# Altium PCB Throttle_Digitizer.PcbDoc
Units mm, origin at the board's own origin, x right, y up, seen from the top; angles counter-clockwise.
Board outline 52 x 30 mm, 2 copper layers (Top Layer, Bottom Layer); 38 components, 22 nets, 124 pads, 0 vias.
Unrouted connection lines stored in the file: 29.
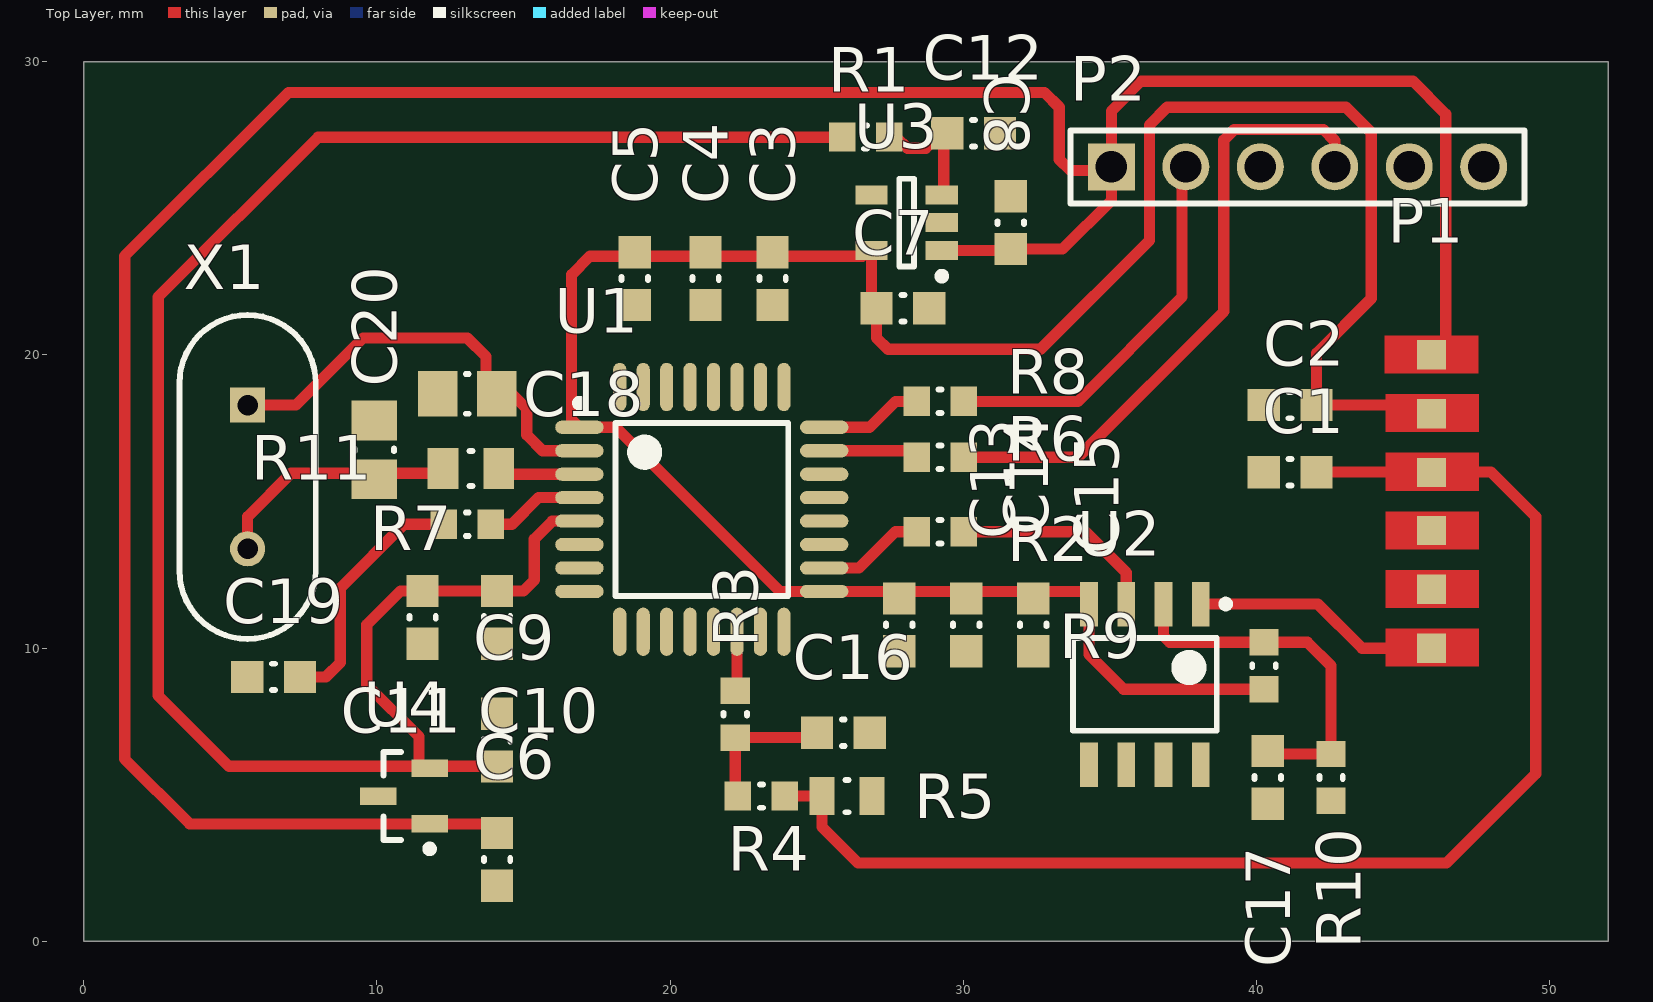
[diagram p0: Top Layer view]
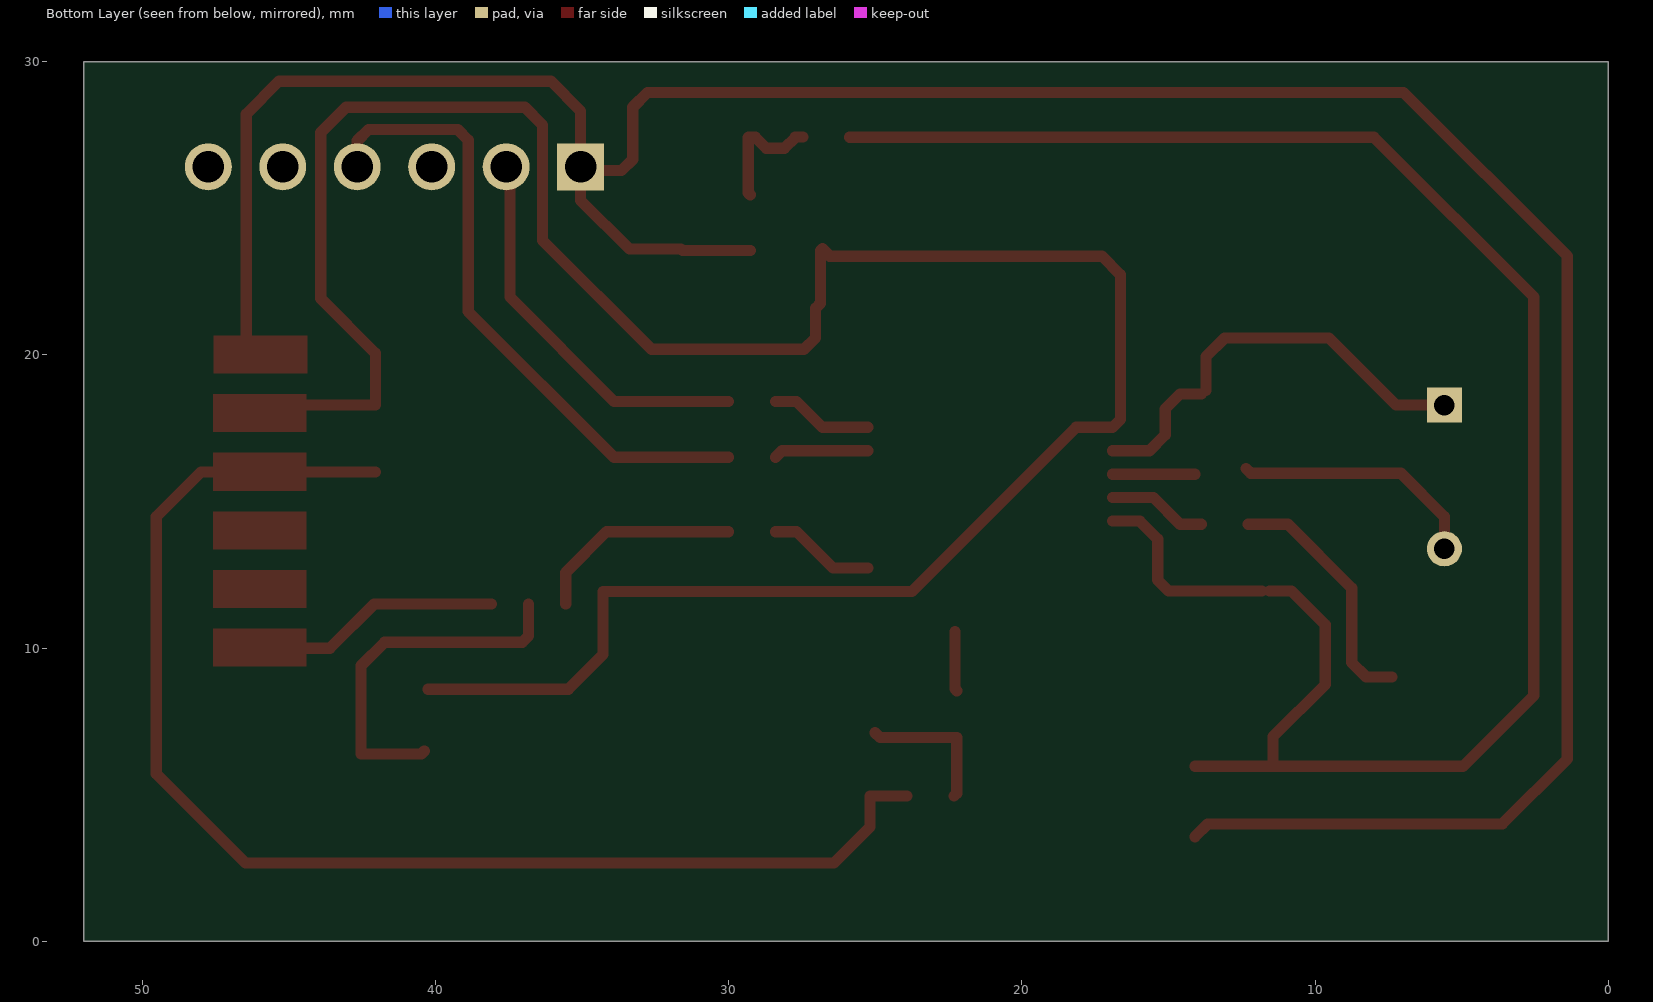
[diagram p1: Bottom Layer view, seen from below]

## Layer stack, top to bottom
Top Solder: solder mask 0.0102, Solder Resist, Dk 3.5
Top Layer: signal copper 0.0356
Dielectric 1: dielectric 0.32, FR-4, Dk 4.8
Bottom Layer: signal copper 0.0356
Bottom Solder: solder mask 0.0102, Solder Resist, Dk 3.5

## Board outline
0,0 52,0 52,30 0,30

## Design rules (kind name [scope] priority, off if disabled: settings)
AcuteAngle [All] p1: minimum=9.00000000000000E+0001 checktracksonly=FALSE
BoardOutlineClearance [All] p1: gap=0.254 except(0: Arc-SplitContinuation Track-SplitContinuation SMDPad-SplitContinuation THPad-SplitContinuation Via-SplitContinuation Fill-SplitContinuation Poly-SplitContinuation Region-SplitContinuation Text-SplitContinuation)
Clearance [All] p1: gap=0.254 except(0.381: Track-Poly SMDPad-Poly THPad-Poly Poly-Poly Poly-Region Poly-Text)
PolygonConnect [All vs InNet('GND')] p1: connectstyle=Direct reliefconductorwidth=0.254 reliefentries=4 polygonreliefangle="90 Angle" airgapwidth=0.254
RoutingVias [All] p1: holewidth=0.711 width=1.27 viastyle="Through Hole" minholewidth=0.711 minwidth=1.27 maxholewidth=0.711 maxwidth=1.27
SolderMaskExpansion [All] p1: expansion=0.102
Width [All] p1: maxlimit=1.27 minlimit=0.381 preferedwidth=0.508 toplayer_prefwidth=0.381 minimp=50.000000 maximp=50.000000 favimp=50.000000
30 further rules are at their usual default settings.

## Classes and differential pairs
component class Connector: C1 C2 P1 P2
component class Digitizer: C3 C4 C5 C6 C7 C8 C9 C10 C11 C12 C13 C14 C15 C16 C17 C18 C19 C20 R1 R2 R3 R4 R5 R6 R7 R8 R9 R10 R11 U1 U2 U3 U4 X1

## Components (designator, comment, footprint, x,y, rotation, side; value= is the part's Value field where it differs from the comment)
C1 "10nF 0603" CAPC0603(1608)100_M 41.148,16.002 r0 top
C2 "10nF 0603" CAPC0603(1608)100_M 41.148,18.288 r0 top
C3 "1uF 0603" CAPC0603(1608)100_M 23.495,22.606 r90 top
C4 "100nF 0603" CAPC0603(1608)100_M 21.209,22.606 r90 top
C5 "4.7nF 0603" CAPC0603(1608)100_M 18.796,22.606 r90 top
C6 "100nF 0603" CAPC0603(1608)100_M 14.097,2.794 r90 top
C7 "CAP 1uF 25V 0603(1608)" CAPC0603(1608)100_M 27.94,21.59 r180 top
C8 "100nF 0603" CAPC0603(1608)100_M 31.623,24.511 r270 top
C9 "CAP 1uF 25V 0603(1608)" CAPC0603(1608)100_M 14.097,6.858 r270 top
C10 "1uF 0603" CAPC0603(1608)100_M 14.097,11.049 r90 top
C11 "1uF 0603" CAPC0603(1608)100_M 11.557,11.049 r90 top
C12 "1uF 0603" CAPC0603(1608)100_M 30.353,27.559 r180 top
C13 "1uF 0603" CAPC0603(1608)100_M 27.813,10.795 r90 top
C14 "100nF 0603" CAPC0603(1608)100_M 30.099,10.795 r90 top
C15 "4.7nF 0603" CAPC0603(1608)100_M 32.385,10.795 r90 top
C16 "100nF 0603" CAPC0603(1608)100_M 25.908,7.112 r180 top
C17 "100nF 0603" CAPC0603(1608)100_M 40.386,5.588 r90 top
C18 "CAP 18pF 100V 0805(2012)" CAPC0805(2012)145_M 13.081,18.669 r180 top
C19 "100nF 0603" CAPC0603(1608)100_M 6.477,9.017 r0 top
C20 "CAP 18pF 100V 0805(2012)" CAPC0805(2012)145_M 9.906,16.764 r90 top
P1 "502352-0601" 502352-0601 45.974,15 r270 top
P2 "PHT-106-01-L-S" SMTC-PHT-106-01-X-S 35.052,26.416 r0 top
R1 "100K" RESC0603(1608)_N 26.67,27.432 r0 top
R2 "1K 0603" RESC0603(1608)_N 29.21,13.97 r0 top
R3 "1K 0603" RESC0603(1608)_N 22.225,7.747 r270 top
R4 "10K 5% 0603(1608)" RESC0603(1608)_N 23.114,4.953 r0 top
R5 "100R 1% 0805(2012)" RESC0805(2012)_L 26.035,4.953 r180 top
R6 "1K 0603" RESC0603(1608)_N 29.21,16.51 r180 top
R7 "1K 0603" RESC0603(1608)_N 13.081,14.224 r180 top
R8 "1K 0603" RESC0603(1608)_N 29.21,18.415 r180 top
R9 "1K" RESC0603(1608)_N 40.259,9.398 r270 top
R10 "1K" RESC0603(1608)_N 42.545,5.588 r90 top
R11 "1M 1% 0805(2012)" RESC0805(2012)_N 13.208,16.129 r180 top
U1 "MC-ARM-STM32F051-SQ32" STM-LQFP32_N 21.082,14.732 r0 top
U2 "LM2903VDR2G" ONSC-SOIC-8-751-07_V 36.195,8.763 r270 top
U3 "NCP114" SOT23-5_N 28.067,24.511 r180 top
U4 "REF3033" SOT23-3 10.922,4.953 r180 top
X1 "HC-49US 8MHz" JPY-HC-49US 5.588,15.838 r270 top

## Footprints (in the part's own frame and the unit in brackets; to place one, negate y for a bottom-side part, rotate by r counter-clockwise, add the part's x,y. Pads: shape width x height; smd on the part's side, far side on the other; paste and mask are expansions set on the pad)
502352-0601 [mm]
  rect 1x1 smd mask-1: 1(-5.004,0) 2(-2.997,0) 3(-0.991,0) 4(0.991,0) 5(2.997,0) 6(5.004,0)
  Top Layer region: 0.336,-1.575 1.636,-1.575 1.636,1.625 0.336,1.625
  Top Layer region: 2.336,-1.575 3.636,-1.575 3.636,1.625 2.336,1.625
  Top Layer region: 4.336,-1.575 5.636,-1.575 5.636,1.625 4.336,1.625
  Top Layer region: -1.664,-1.575 -0.364,-1.575 -0.364,1.625 -1.664,1.625
  Top Layer region: -3.664,-1.575 -2.364,-1.575 -2.364,1.625 -3.664,1.625
  Top Layer region: -5.664,-1.6 -4.364,-1.6 -4.364,1.6 -5.664,1.6
  body extent -8.05,-1.76 7.95,7.64, height 6.41
CAPC0603(1608)100_M [mm] "Chip Capacitor, Body 1.6x0.8mm, Height 1.0mm, IPC Low Density"
  rect 1.1x1.1 smd: 1(-0.9,0) 2(0.9,0)
  silkscreen extent -0.05,-0.45 0.05,0.45, body extent -0.87,-0.47 0.88,0.48, height 1
CAPC0805(2012)145_M [mm] "Chip Capacitor, Body 2.0x1.2mm, Height 1.45mm, IPC Low Density"
  rect 1.35x1.55 smd: 1(-1,0) 2(1,0)
  silkscreen extent -0.05,-0.67 0.05,0.67, body extent -1.1,-0.72 1.1,0.72, height 1.45
JPY-HC-49US [mm] "THD, 2-Leads, Body 11.05x4.65mm, Pitch 4.9mm"
  rect 1.2x1.2 hole 0.7: 1(-2.45,0)
  round 1.2 hole 0.7: 2(2.45,0)
  silkscreen extent -5.53,-2.32 5.53,2.32, body extent -5.53,-2.33 5.52,2.32, height 3.5
ONSC-SOIC-8-751-07_V [mm] "SOIC, 8-Leads, Body 4.9x3.9mm, Pitch 1.27mm"
  rect 1.52x0.6 smd: 1(-2.74,1.905) 2(-2.74,0.635) 3(-2.74,-0.635) 4(-2.74,-1.905) 5(2.74,-1.905) 6(2.74,-0.635) 7(2.74,0.635) 8(2.74,1.905)
  silkscreen extent -2.86,-2.45 1.58,2.88, body extent -1.95,-2.45 1.95,2.45, height 1.75
RESC0603(1608)_N [mm] "Chip Resistor, Body 1.6x0.8mm, IPC Medium Density"
  rect 0.9x1 smd: 1(-0.8,0) 2(0.8,0)
  silkscreen extent -0.05,-0.4 0.05,0.4, body extent -0.85,-0.47 0.85,0.47, height 0.6
RESC0805(2012)_L [mm] "Chip Resistor, Body 2.0x1.3mm, IPC High Density"
  rect 0.85x1.3 smd: 1(-0.85,0) 2(0.85,0)
  silkscreen extent -0.05,-0.55 0.05,0.55, body extent -1.1,-0.67 1.1,0.68, height 0.7
RESC0805(2012)_N [mm] "Chip Resistor, Body 2.0x1.3mm, IPC Medium Density"
  rect 1.05x1.4 smd: 1(-0.95,0) 2(0.95,0)
  silkscreen extent -0.05,-0.6 0.05,0.6, body extent -1.1,-0.67 1.1,0.68, height 0.7
SMTC-PHT-106-01-X-S [mm] "Press Fit Socket Assembly, 1x6 Pins, Vertical, 2.54mm Pitch, Male"
  rect 1.6x1.6 hole 1.081: 1(0,0)
  round 1.6 hole 1.081: 2(2.54,0) 3(5.08,0) 4(7.62,0) 5(10.16,0) 6(12.7,0)
  silkscreen extent -1.4,-1.24 14.1,1.24, body extent -1.26,-1.25 13.96,1.25, height 8.38
SOT23-3 [mm] "SOT23, 3-Leads, Body 3.04x1.4mm, Pitch 0.96mm, IPC High Density"
  rect 1.25x0.6 smd: 1(-0.875,0.95) 2(-0.875,-0.95) 3(0.875,0)
  silkscreen extent -1,-1.5 0.7,1.92, body extent -0.7,-1.52 0.7,1.52, height 1.12
SOT23-5_N [mm] "SOT23, 5-Leads, Body 2.9x1.6mm, Pitch 0.95mm, Lead Span 2.8mm, IPC Medium Density"
  rect 1.1x0.65 smd: 1(-1.2,0.95) 2(-1.2,0) 3(-1.2,-0.95) 4(1.2,-0.95) 5(1.2,0.95)
  silkscreen extent -1.33,-1.5 0.25,1.95, body extent -0.87,-1.5 0.87,1.5, height 1.45
STM-LQFP32_N [mm] "QFP, 32-Leads, Body 7x7mm, Pitch 0.8mm, IPC Medium Density"
  oval 1.65x0.45 smd: 1(-4.175,2.8) 2(-4.175,2) 3(-4.175,1.2) 4(-4.175,0.4) 5(-4.175,-0.4) 6(-4.175,-1.2) 7(-4.175,-2) 8(-4.175,-2.8) 17(4.175,-2.8) 18(4.175,-2) 19(4.175,-1.2) 20(4.175,-0.4) 21(4.175,0.4) 22(4.175,1.2) 23(4.175,2) 24(4.175,2.8)
  oval 0.45x1.65 smd: 9(-2.8,-4.175) 10(-2,-4.175) 11(-1.2,-4.175) 12(-0.4,-4.175) 13(0.4,-4.175) 14(1.2,-4.175) 15(2,-4.175) 16(2.8,-4.175) 25(2.8,4.175) 26(2,4.175) 27(1.2,4.175) 28(0.4,4.175) 29(-0.4,4.175) 30(-1.2,4.175) 31(-2,4.175) 32(-2.8,4.175)
  silkscreen extent -4.3,-2.95 2.95,3.75, body extent -3.5,-3.5 3.5,3.5, height 1.6

## Part data
C1 C2: library part CMP-1035-02325-1, "CAP 10nF 100V ±10% 0603 (1608 Metric) Thickness 1mm SMD"
C3 C4 C5 C6 C7 C8 C9 C10 C11 C12 C13 C14 C15 C16 C17 C19: library part CMP-1035-02742-1, "CAP 1uF 25V -20% to +80% 0603 (1608 Metric) Thickness 1mm SMD"
C18 C20: library part CMP-1036-01160-1, "CAP 18pF 100V ±10% 0805 (2012 Metric) Thickness 1.45mm SMD"
P2: library part CMP-1024-00187-1, "Press Fit Header, Through-hole, Vertical, -55 to 125 degC, 2.54 mm Pitch, 6-Pin, Male, RoHS"
R1 R2 R3 R6 R7 R8 R9 R10: library part CMP-1012-00542-1, "2K 0.1W 1% 0603 (1608 Metric)  SMD"
R4: library part CMP-1012-00098-1, "10K 0.1W 5% 0603 (1608 Metric)  SMD"
R5: library part CMP-1013-00397-1, "100R 0.125W 1% 0805 (2012 Metric)  SMD"
R11: library part CMP-1013-00849-1, "1M 0.125W 1% 0805 (2012 Metric)  SMD"
U2: library part CMP-1305-00050-1, "Low Offset Voltage Dual Comparators, 2 to 36 V, -40 to 125 degC, 8-Pin SOIC, Pb-Free, Tape and Reel"
X1: library part CMP-2100-03645-1, "Crystal, 16 MHz, +/- 30 ppm, 18 pF, -20 to 70 degC, 2-Pin THD"

## Nets (pads, with @x,y where several pads share a name; then routed paths per layer and width w, separated by ;. In a path a pad name is that pad's centre, name@x,y a point inside that pad or via, vN(x,y) a via of type N, cw(c..) or ccw(c..) an arc to the next point about the centre after c; other vN are vias at no path point)
1.65V: C17.2 R9.1 R10.2 U2.2 | length 12.4
  Top Layer w0.381: U2.2 36.83,10.414 37.046,10.198 R9.1 41.745,10.198 42.545,9.398 R10.2 40.486,6.388 C17.2
3V3: C2.2 C3.2 C4.2 C5.2 C7.2 C13.2 C14.2 C15.2 P1.2 R9.2 U1.1 U1.17 U2.4 U3.5 | length 84.5
  Top Layer w0.381: R9.2 35.471,8.598 34.29,9.779 U2.4 34.29,11.932 U1.17 23.755,11.932 18.155,17.532 U1.1 16.637,17.802 16.637,22.733 17.272,23.368 21.209,23.368 26.552,23.368 26.806,23.622 U3.5 26.867,21.763 C7.2 27.04,20.585 27.432,20.193 32.639,20.193 36.347,23.901 36.347,27.838 36.957,28.448 43.053,28.448 43.917,27.584 43.917,21.923 42.048,20.055 C2.2 45.683,18.288 P1.2
3V3_REF: C9.2 C10.2 C11.2 R1.1 U1.5 U4.2 | length 66.6
  Top Layer w0.381: C11.2 10.806,11.949 9.652,10.795 9.652,8.763 11.43,6.985 U4.2@11.43,5.969 ; C11.2@11.811,11.949 C10.2 14.997,11.949 15.367,12.319 15.367,13.716 15.983,14.332 U1.5 ; C9.2@14.097,5.969 U4.2@11.43,5.969 ; R1.1 25.87,27.423 7.992,27.423 2.54,21.971 2.54,8.382 4.953,5.969 U4.2@11.43,5.969
5V: C6.2 C8.2 P1.1 P2.1 U3.1 U4.1 | length 99.4
  Top Layer w0.381: C6.2@14.097,3.567 13.661,4.003 U4.1 3.617,4.003 1.397,6.223 1.397,23.368 6.985,28.956 32.766,28.956 33.274,28.448 33.274,26.67 33.655,26.289 34.925,26.289 P2.1 ; U3.1 31.573,23.561 C8.2 33.39,23.611 35.052,25.273 P2.1 ; P1.1 46.457,20.486 46.457,28.219 45.339,29.337 36.068,29.337 35.052,28.321 P2.1
GND: C1.1 C2.1 C3.1 C4.1 C5.1 C6.1 C7.1 C8.1 C9.1 C10.1 C11.1 C12.1 C13.1 C14.1 C15.1 C16.1 C17.1 C18.2 C19.1 C20.2 P1.4 P1.5 P2.3 R5.1 R10.1 U1.16 U1.32 U2.8 U3.2 U4.3
NetC1_2: C1.2 P1.3 R4.2 R5.2 | length 45.3
  Top Layer w0.381: R4.2 R5.2 25.185,3.898 26.416,2.667 46.482,2.667 49.53,5.715 49.53,14.478 48.006,16.002 P1.3@45.963,16.002 ; C1.2 P1.3@45.963,16.002 ; P1.3 P1.3@45.963,16.002
NetC12_2: C12.2 R1.2 U3.3 | length 4.2
  Top Layer w0.381: R1.2 27.73,27.432 27.73,27.423 28.101,27.051 28.722,27.051 29.093,27.423 29.093,27.432 29.326,27.432 29.337,27.421 29.337,25.531 U3.3
NetC16_2: C16.2 R3.2 R4.1 | length 4.9
  Top Layer w0.381: R4.1 22.225,5.042 R3.2 24.843,6.947 C16.2
NetC18_1: C18.1 U1.2 X1.1 | length 14.8
  Top Layer w0.381: X1.1 7.239,18.288 9.525,20.574 13.081,20.574 13.716,19.939 C18.1@13.716,18.796 ; C18.1@13.881,18.669 C18.1 14.605,18.669 15.113,18.161 15.113,17.272 15.653,16.732 U1.2
NetC19_2: C19.2 R7.2 | length 8.5
  Top Layer w0.381: C19.2 8.255,9.017 8.751,9.513 8.751,12.053 10.922,14.224 R7.2
NetC20_1: C20.1 R11.2 X1.2 | length 8.5
  Top Layer w0.381: X1.2 5.588,14.478 7.074,15.964 12.193,15.964 R11.2@12.358,16.129
NetP1_6: P1.6 U2.1 | length 8.5
  Top Layer w0.381: U2.1 42.091,11.503 43.598,9.996 P1.6
NetR2_1: R2.1 U1.18 | length 3.7
  Top Layer w0.381: U1.18 26.448,12.732 27.686,13.97 R2.1
NetR2_2: R2.2 U2.3 | length 7.2
  Top Layer w0.381: R2.2 34.163,13.97 35.56,12.573 U2.3
NetR3_1: R3.1 U1.14 | length 2
  Top Layer w0.381: R3.1 22.282,8.604 U1.14
NetR6_2: R6.2 U1.23 | length 3.2
  Top Layer w0.381: U1.23 28.188,16.732 R6.2
NetR7_1: R7.1 U1.4 | length 3.4
  Top Layer w0.381: R7.1 14.605,14.224 15.513,15.132 U1.4
NetR8_2: R8.2 U1.24 | length 3.5
  Top Layer w0.381: U1.24 26.803,17.532 27.686,18.415 R8.2
NetR11_1: R11.1 U1.3 | length 2.8
  Top Layer w0.381: R11.1@14.097,15.932 U1.3
NRESET: P2.5
SWCLK: P2.2 R8.1 | length 13.4
  Top Layer w0.381: R8.1 33.909,18.415 37.465,21.971 P2.2@37.465,26.416
SWD: P2.4 R6.1 | length 21.8
  Top Layer w0.381: R6.1 33.909,16.51 38.887,21.488 38.887,27.33 39.243,27.686 42.291,27.686 42.672,27.305 P2.4
pads on no net: P2.6 U1.6 U1.7 U1.8 U1.9 U1.10 U1.11 U1.12 U1.13 U1.15 U1.19 U1.20 U1.21 U1.22 U1.25 U1.26 U1.27 U1.28 U1.29 U1.30 U1.31 U2.5 U2.6 U2.7 U3.4

## Silkscreen, mask and mechanical layers (free items; w line width, h text height)
Mechanical 1:
  the board outline again, w0.254